# Altium PCB TMR_RAD_COMPARE.PcbDoc
Units mm, origin at the board's own origin, x right, y up, seen from the top; angles counter-clockwise.
Board outline 23.62 x 11.68 mm, 2 copper layers (Top Layer, Bottom Layer); 6 components, 4 nets, 16 pads, 3 vias.
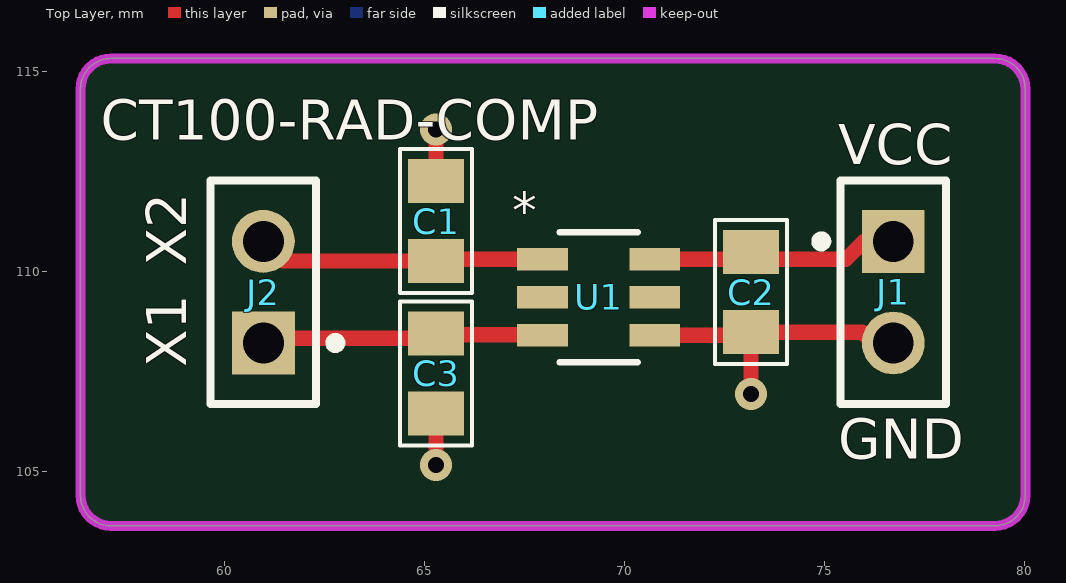
[diagram p0: Top Layer view]
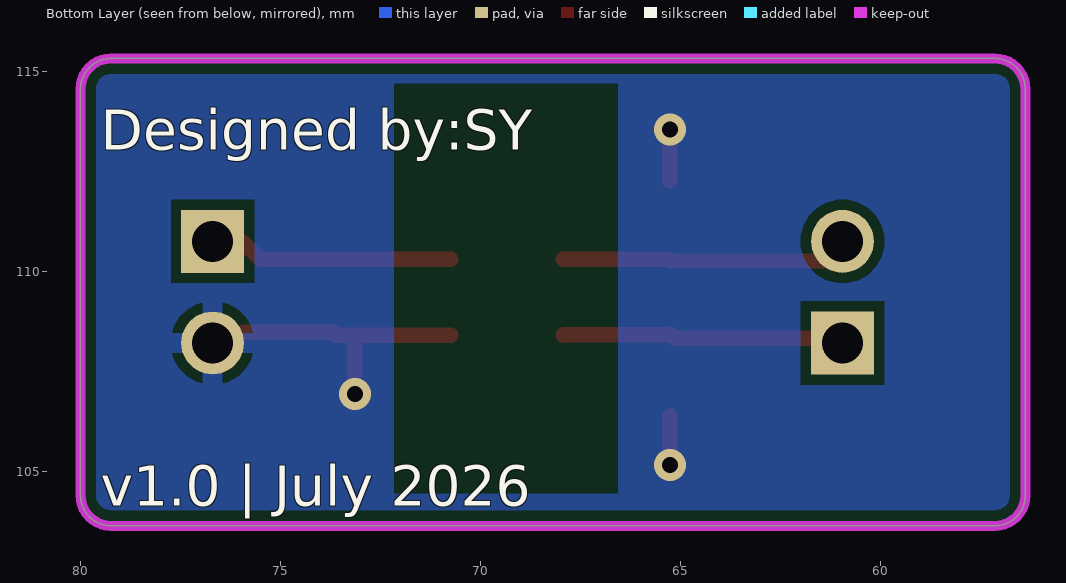
[diagram p1: Bottom Layer view, seen from below]
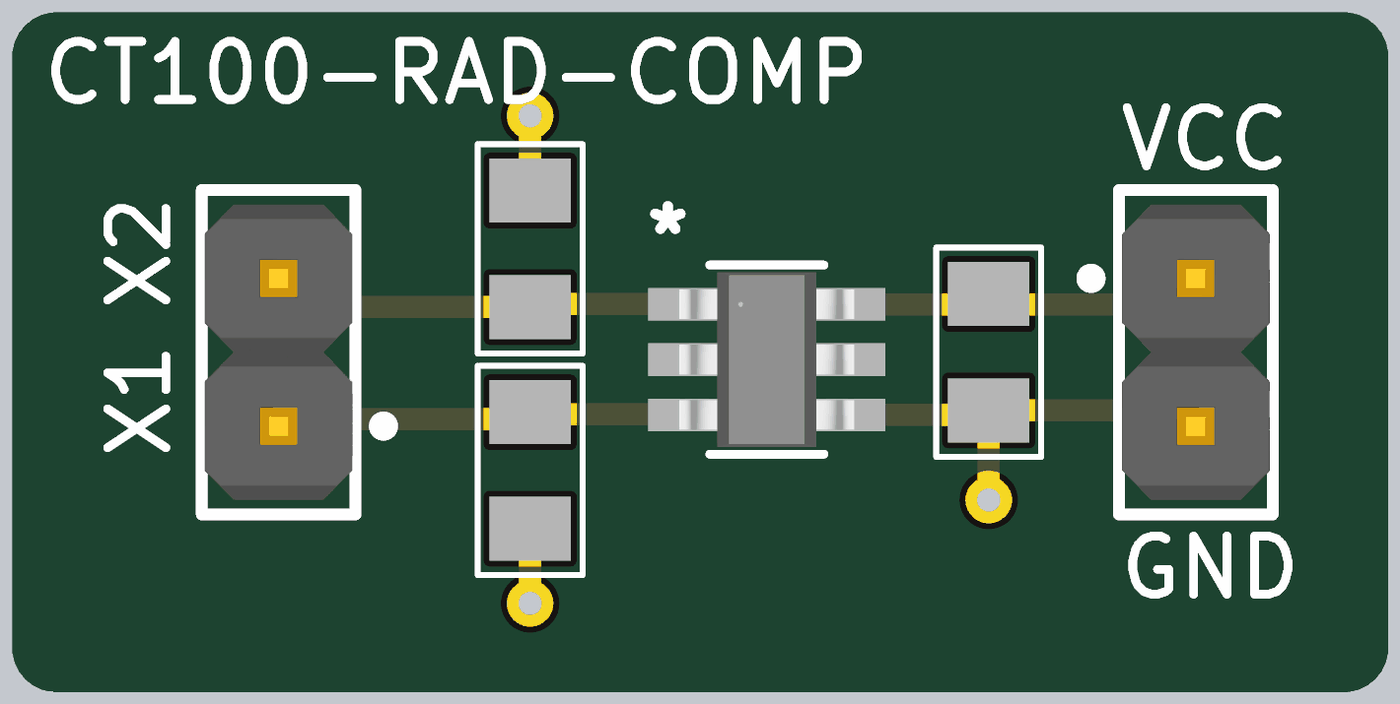
[diagram p2: 3D render of the assembled board from above, using the file's embedded part models]

## Layer stack, top to bottom
Top Solder: solder mask 0.0102, Solder Resist, Dk 3.5
Top Layer: signal copper 0.0356
Dielectric 1: dielectric 0.32, FR-4, Dk 4.8
Bottom Layer: signal copper 0.0356
Bottom Solder: solder mask 0.0102, Solder Resist, Dk 3.5

## Board outline
56.388,104.394 56.388,114.554 cw(c57.15,114.554) 57.15,115.316 79.248,115.316 cw(c79.248,114.554) 80.01,114.554 80.01,104.394 cw(c79.248,104.394) 79.248,103.632 57.15,103.632 cw(c57.15,104.394)

## Design rules (kind name [scope] priority, off if disabled: settings)
BoardOutlineClearance [All] p1: gap=0.3 ignorepadtopadclearanceinfootprint=FALSE except(0.4: Arc-SplitBarrior Arc-SplitContinuation Track-SplitBarrior Track-SplitContinuation SMDPad-SplitBarrior SMDPad-SplitContinuation THPad-SplitBarrior THPad-SplitContinuation Via-SplitBarrior Via-SplitContinuation Fill-SplitBarrior Fill-SplitContinuation Poly-SplitBarrior Poly-SplitContinuation Region-SplitBarrior Region-SplitContinuation Text-SplitBarrior Text-SplitContinuation)
Clearance [All] p1: gap=0.254 ignorepadtopadclearanceinfootprint=TRUE
Height [All] p1: minheight=0 maxheight=50 prefheight=12.7
HoleSize [All] p1: absolutevalues=TRUE maxlimit=12 minlimit=0.25 maxpercent=80.000 minpercent=20.000
MinimumAnnularRing [All] p1: minimumring=0.13
MinimumSolderMaskSliver [All] p1: minsoldermaskwidth=0.1
PolygonConnect PolygonConnect_1 [All] p1: thpad.connectstyle=Relief thpad.reliefconductorwidth=0.508 thpad.reliefentries=4 thpad.polygonreliefangle="90 Angle" thpad.airgapwidth=0.254 smdpad.connectstyle=Relief smdpad.reliefconductorwidth=0.508 smdpad.reliefentries=4 smdpad.polygonreliefangle="90 Angle" smdpad.airgapwidth=0.254 via.connectstyle=Direct via.reliefconductorwidth=0.508 via.reliefentries=4 via.polygonreliefangle="90 Angle" via.airgapwidth=0.254
RoutingCorners [All] p1: cornerstyle=Round minsetback=2.54 maxsetback=2.54
RoutingVias [All] p1: holewidth=0.4 width=0.65 viastyle="Through Hole" minholewidth=0.25 minwidth=0.4 maxholewidth=1 maxwidth=2
SilkToSilkClearance [All] p1: silktosilkclearance=0.1
SilkToSolderMaskClearance [IsPad] p1: minsilkscreentomaskgap=0.1 clearancetoexposedcopper=TRUE
SolderMaskExpansion [All] p1: expansion=0.102 istentingtop=FALSE
Width [All] p1: maxlimit=10.16 minlimit=0.127 preferedwidth=0.508
24 further rules are at their usual default settings.

## Components (designator, comment, footprint, x,y, rotation, side; value= is the part's Value field where it differs from the comment)
C1 "*" "0805 CAP" 65.278,111.252 r270 top
C2 "*" "0805 CAP" 73.152,109.474 r270 top
C3 "*" "0805 CAP" 65.278,107.442 r270 top
J1 "M20-9990245" FP-M20-9990245-MFG 76.708,109.474 r270 top
J2 "M20-9990245" FP-M20-9990245-MFG 60.96,109.474 r90 top
U1 "CT100LW-HS6" CT100LW-HS6-Footprint-1 69.342,109.347 r0 top

## Footprints (in the part's own frame and the unit in brackets; to place one, negate y for a bottom-side part, rotate by r counter-clockwise, add the part's x,y. Pads: shape width x height; smd on the part's side, far side on the other; paste and mask are expansions set on the pad)
"0805 CAP" [mm] "http://www.digikey.co.nz/Web%20Export/Supplier%20Content/Vishay_8026/PDF/VishayBeyschlag_SolderPad.pdf?redirected=1 with dimension G modified by +0.25mm"
  rect 1.1x1.4 smd: 1(-1,0) 2(1,0)
  silkscreen extent -1.8,-0.9 1.8,0.9, body extent -1.04,-0.66 1.04,0.66, height 0.61
CT100LW-HS6-Footprint-1 [mil]
  rect 50x22 smd paste+0 mask+0: 1(-55.25,37.4) 2(-55.25,0) 3(-55.25,-37.4) 4(55.25,-37.4) 5(55.25,0) 6(55.25,37.4)
  silkscreen extent -38,-64 38,64, body extent -59,-59 59,59, height 53
FP-M20-9990245-MFG [mm]
  rect 1.57x1.57 hole 1.02 paste-2539.97 mask+0: 1(-1.27,0)
  round 1.57 hole 1.02 paste-2539.97 mask+0: 2(1.27,0)
  silkscreen extent -2.79,-1.92 2.79,1.32, body extent -2.89,-1.42 2.89,1.42, height 0.25

## Part data
C1 C2 C3: library part CerCap_SMT_0805, "SMT ceramic capacitor 0805 size"
J1 J2: library part CMP-15831-000105-1, "CONN HEADER VERT 2POS 2.54MM", Case/Package=SIL, Color=Black, Contact Resistance=25mR, Current=3A, Flammability Rating="UL94 V-0", Insulation Resistance=10GR, Max Operating Temperature=105°C, Min Operating Temperature=-40°C, Package Quantity=1000, Voltage=50V, Voltage Rating (AC)=750V, Connector Type="Male Pin", Contact Finish - Mating=GOLD, Contact Material=Brass, Contact Mating Length=0.24inch, Contact Plating=Gold, Contact Shape=Square, Contact Type="Male Pin", Current Rating=3A, Depth=2.54mm, Fastening Type=Pull, Gender=Male, Height=0.12inch, Housing Color=Black, Housing Material=Nylon, Insulation Color=Black, Insulation Material=Nylon, Lead Pitch=2.54mm, Length=5.08mm, Mated Stacking Heights=16.54mm, Mating Cycles=300, Max Current Rating=3A, Mount="Through Hole", Number of Contacts=2, Number of Poles=2, Number of Positions=2, Number of Rows=1, Orientation=Straight, Packaging=Bulk, Pitch=2.54mm, Radiation Hardening=No, Reach SVHC Compliant=Yes, Series=M20, Termination=Solder, Weight=0.25lb, Width=0.25inch, Working Voltage=750V
U1: library part CMP-010-00004-1, "Magnetoresistive Sensor, -50mT Min, 50mT Max, -1.43-1.43V, Rectangular, 6 Pin, Surface Mount", Max Operating Temperature=125°C, Max Supply Voltage=5.5V, Min Operating Temperature=-40°C, Min Supply Voltage=1V, Height=1.1mm, Introduction Date=2023-11-30, Length=2.9mm, Lifecycle Status=Production, Mounting Technology="Surface Mount", Number of Terminals=6, REACH SVHC=Yes, RoHS=Compliant

## Via types
v1: diameter 0.8, hole 0.4, Top Layer to Bottom Layer, 3 vias

## Nets (pads, with @x,y where several pads share a name; then routed paths per layer and width w, separated by ;. In a path a pad name is that pad's centre, name@x,y a point inside that pad or via, vN(x,y) a via of type N, cw(c..) or ccw(c..) an arc to the next point about the centre after c; other vN are vias at no path point)
3V3: C2.1 J1.1 U1.6 | length 6.1
  Top Layer w0.381: U1.6 73.66,110.297 75.524,110.297 75.971,110.744 J1.1
GND: C1.1 C2.2 C3.2 J1.2 U1.4 | length 9.5
  Top Layer w0.381: v1(65.278,105.156) C3.2@65.278,106.39 ; C1.1 v1(65.278,113.538) ; U1.4 C2.2@73.631,108.397 ; C2.2@73.123,108.397 73.152,108.368 v1(73.152,106.934) ; C2.2@73.66,108.474 75.93,108.474 J1.2@76.2,108.204
X1: C3.1 J2.1 U1.3 | length 7.1
  Top Layer w0.381: J2.1 61.079,108.323 65.159,108.323 C3.1 ; C3.1@65.278,108.407 67.928,108.407 U1.3
X2: C1.2 J2.2 U1.1 | length 7.2
  Top Layer w0.381: J2.2 61.452,110.252 C1.2 ; C1.2@65.278,110.299 67.936,110.299 U1.1
pads on no net: U1.2 U1.5

## Polygon pours and split planes (outlines as drawn)
GND on Bottom Layer "GND_L02_P000" (solid, pour order 0): 56.388,115.316 82.55,115.316 82.55,103.632 56.388,103.632

## Keep-outs
Keep-Out Layer:
  lines w0.254: 56.388,104.394 ccw(c57.15,104.394) 57.15,103.632 ; 56.388,104.394 ccw(c57.15,104.394) 57.15,103.632 ; 56.388,104.394 56.388,114.554 ; 56.388,104.394 56.388,114.554 ; 56.388,114.554 cw(c57.15,114.554) 57.15,115.316 ; 56.388,114.554 cw(c57.15,114.554) 57.15,115.316 ; 57.15,103.632 79.248,103.632 ; 57.15,103.632 79.248,103.632 ; 57.15,115.316 79.248,115.316 ; 57.15,115.316 79.248,115.316 ; 79.248,103.632 ccw(c79.248,104.394) 80.01,104.394 ; 79.248,103.632 ccw(c79.248,104.394) 80.01,104.394 ; 79.248,115.316 cw(c79.248,114.554) 80.01,114.554 ; 79.248,115.316 cw(c79.248,114.554) 80.01,114.554 ; 80.01,104.394 80.01,114.554 ; 80.01,104.394 80.01,114.554

## Other copper
Bottom Layer:
  pour cut-out: 66.573,114.681 72.161,114.681 72.161,104.445 66.573,104.445

## Silkscreen, mask and mechanical layers (free items; w line width, h text height)
Top Overlay:
  text "CT100-RAD-COMP" at 56.896,113.284 h1
  text "VCC" at 75.334,112.672 h1
  text "X2" at 59.032,110.132 h1 r90
  text "X1" at 59.032,107.592 h1 r90
  text "GND" at 75.334,105.306 h1
Bottom Overlay:
  text "Designed by:SY" at 79.502,113.03 h1
  text "v1.0 | July 2026" at 79.502,104.14 h1

## Text inside footprints (layer, text, board x,y; h text height)
U1: Top Overlay "*" at 67.183,111.074 h0.9; Mechanical 13 "*" at 68.555,109.499 h0.9